# Altium PCB main.PcbDoc
Units mil, origin at the board's own origin, x right, y up, seen from the top; angles counter-clockwise.
Board outline 6000 x 4000 mil, 2 copper layers (Top Layer, Bottom Layer); 94 components, 60 nets, 334 pads, 49 vias.
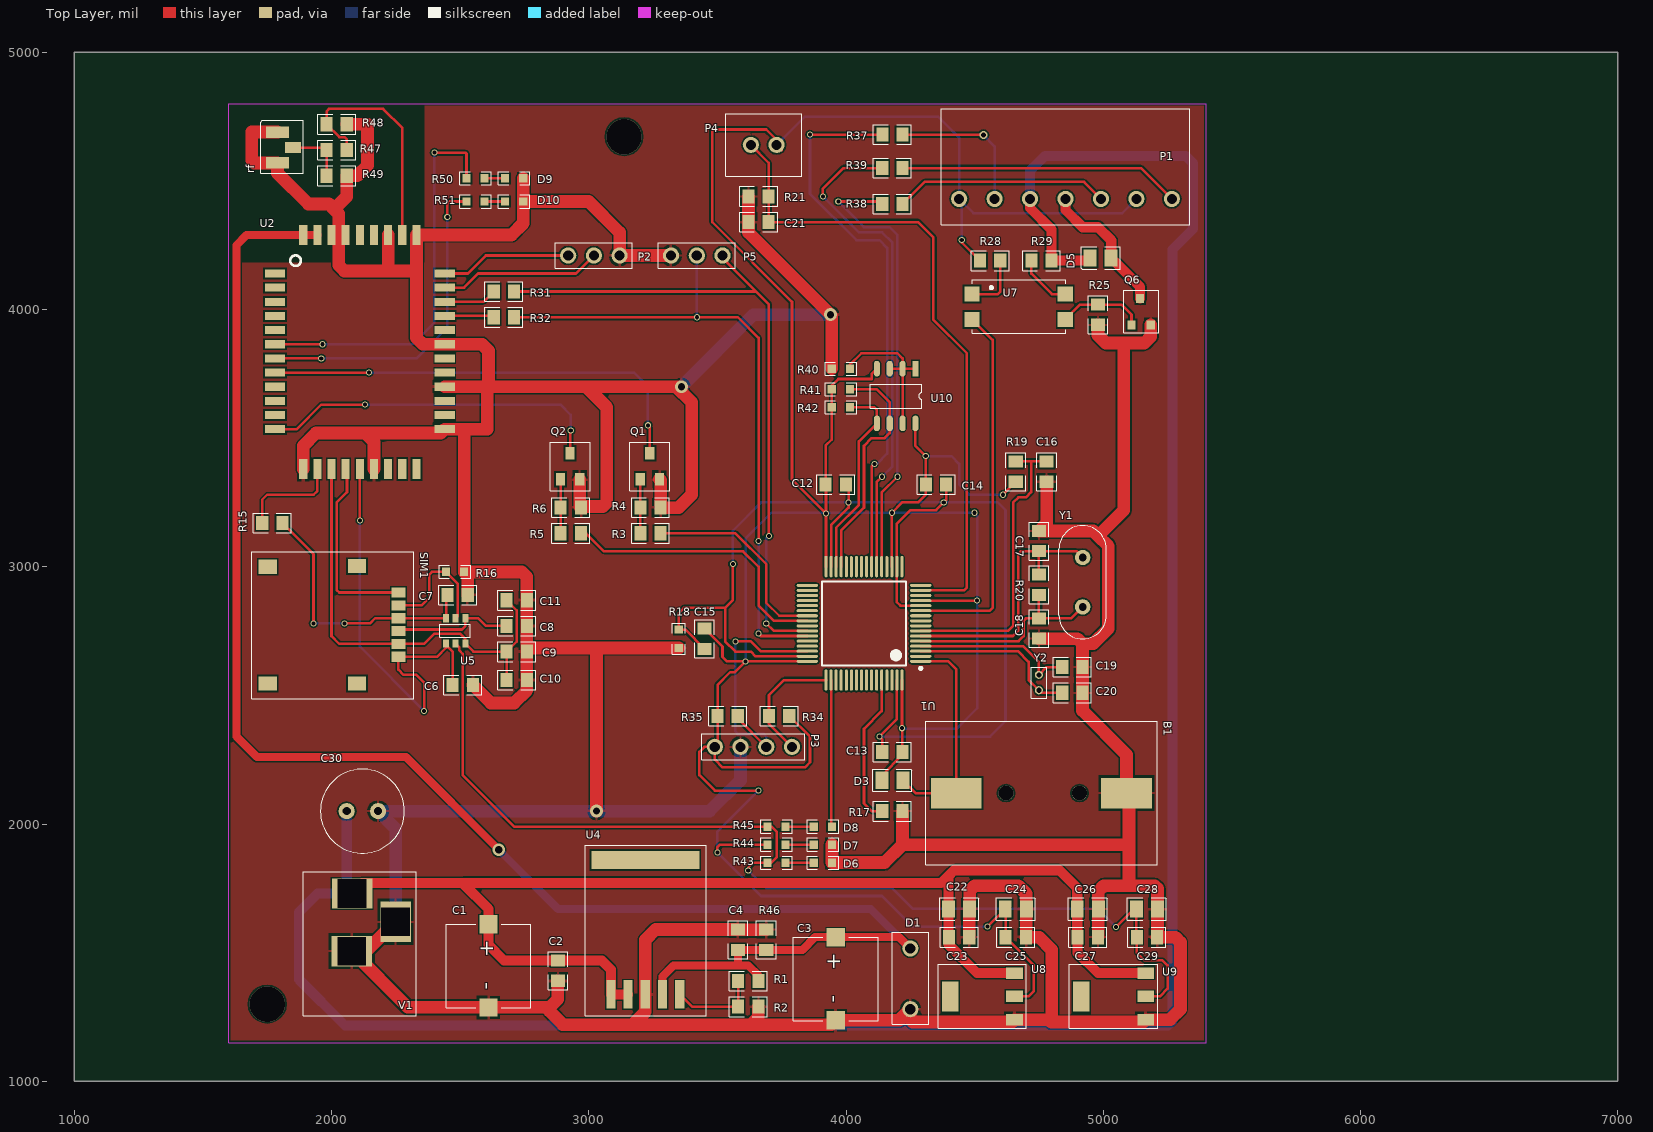
[diagram p0: Top Layer view]
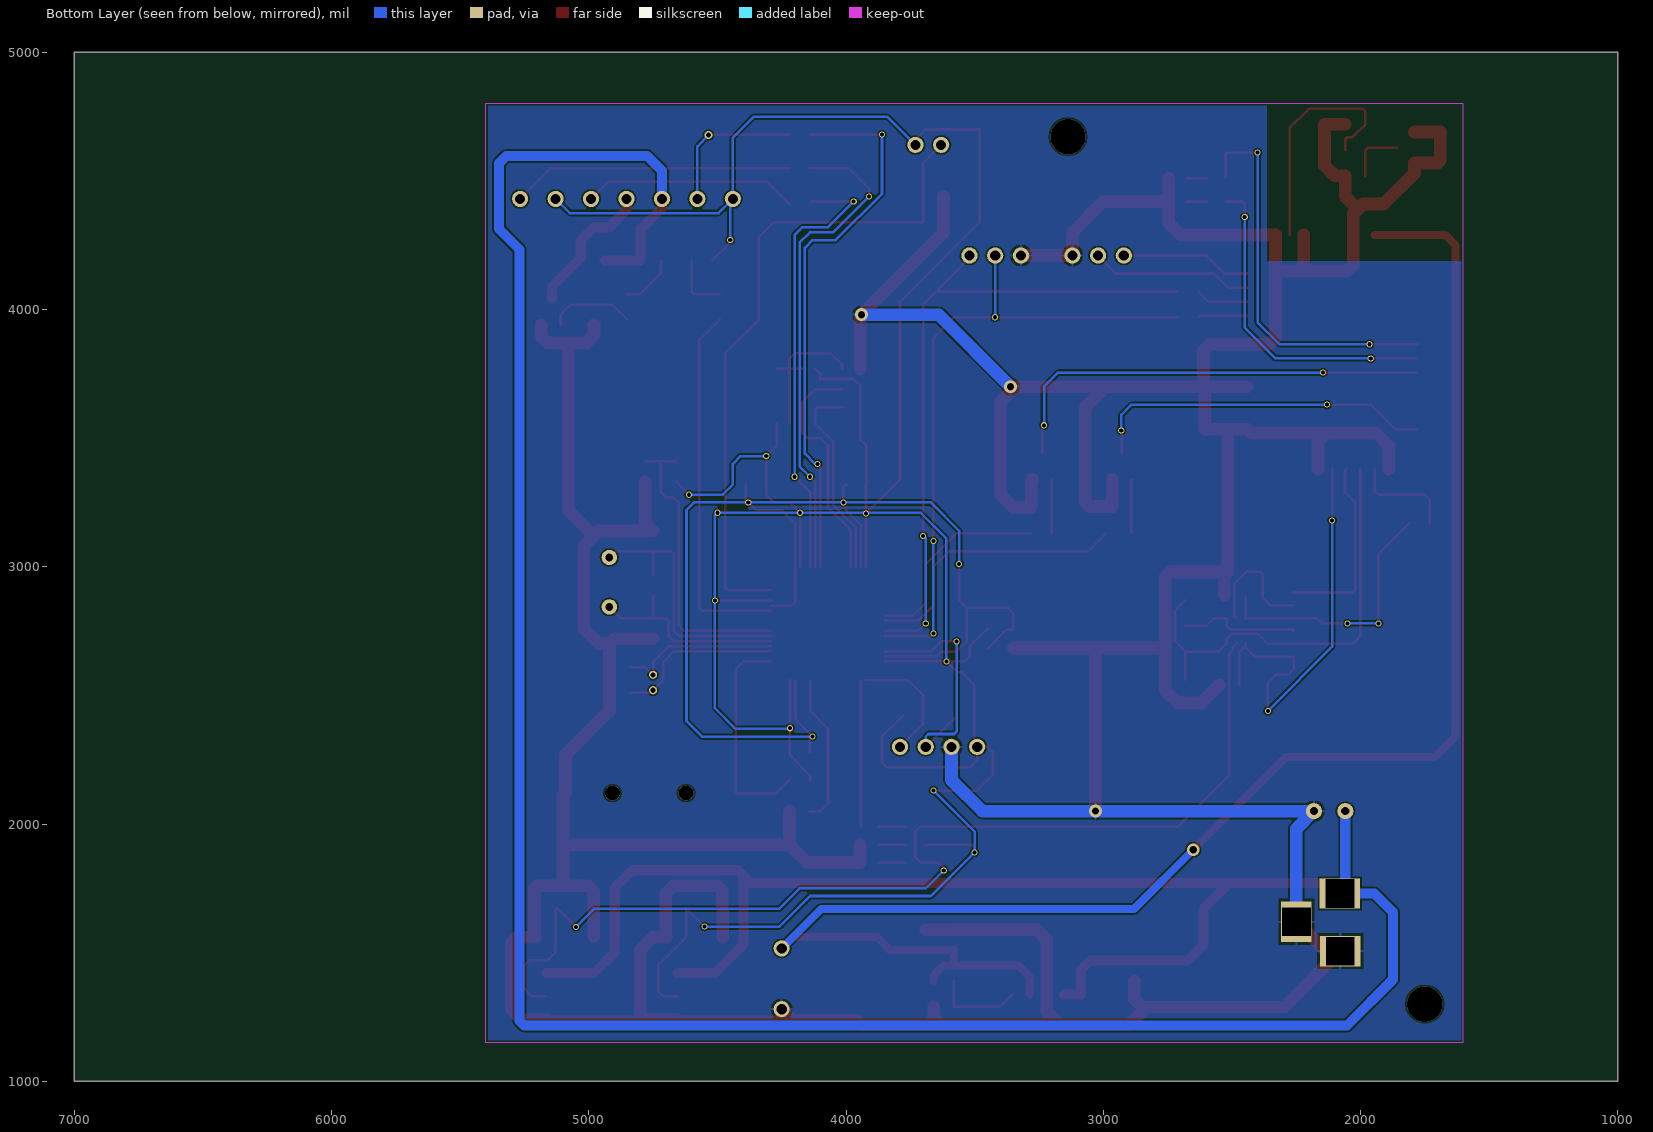
[diagram p1: Bottom Layer view, seen from below]

## Layer stack, top to bottom
Top Solder: solder mask 0.4, Solder Resist, Dk 3.5
Top Layer: signal copper 1.4
Dielectric 1: dielectric 12.6, FR-4, Dk 4.8
Bottom Layer: signal copper 1.4
Bottom Solder: solder mask 0.4, Solder Resist, Dk 3.5

## Board outline
1000,1000 7000,1000 7000,5000 1000,5000

## Design rules (kind name [scope] priority, off if disabled: settings)
Clearance [All] p1: gap=6.06
PolygonConnect [All] p1: connectstyle=Relief reliefconductorwidth=10 reliefentries=4 polygonreliefangle="90 Angle" airgapwidth=10
RoutingVias [All] p1: holewidth=28 width=50 viastyle="Through Hole" minholewidth=28 minwidth=50 maxholewidth=28 maxwidth=50
SolderMaskExpansion [All] p1: expansion=4
Width NetD5_1 [InNet('NetD5_1')] p1: maxlimit=39.37 minlimit=39.37 preferedwidth=39.37
Width NetD4_1 [InNet('NetD4_1')] p2: maxlimit=39.37 minlimit=39.37 preferedwidth=39.37
Width VCC4.16 [InNet('VCC4.16')] p3: maxlimit=31.5 minlimit=31.5 preferedwidth=31.5
Width GND [InNet('GND')] p4: maxlimit=49.37 minlimit=49.37 preferedwidth=49.37
Width VCC12 [InNet('VCC12V')] p5: maxlimit=39.37 minlimit=39.37 preferedwidth=39.37
Width [All] p6: maxlimit=10 minlimit=10 preferedwidth=10
29 further rules are at their usual default settings.

## Components (designator, comment, footprint, x,y, rotation, side; value= is the part's Value field where it differs from the comment)
B1 "CR1220" CR1220 4760,2120 r0 top
C1 "470uF" CAP_8.2MM*8.2MM 2610,1610 r270 top
C2 "100nF" 0805 2880,1430 r90 top
C3 "470uF" CAP_8.2MM*8.2MM 3960,1560 r270 top
C4 "100nF" 0805 3580,1550 r90 top
C6 "33pF" 0805 2510,2540 r180 top
C7 "33pF" 0805 2490,2890 r180 top
C8 "33pF" 0805 2720,2770 r180 top
C9 "33pF" 0805 2720,2670 r180 top
C10 "1uF" 0805 2720,2560 r180 top
C11 "100pF" 0805 2720,2870 r180 top
C12 "0.1uF" 0805 3960,3320 r0 top
C13 "0.1uF" 0805 4180,2280 r180 top
C14 "0.1uF" 0805 4350,3320 r0 top
C15 "0.1uF" 0805 3450,2720 r270 top
C16 "0.1uF" 0805 4780,3370 r270 top
C17 "20pF" 0805 4750,3100 r270 top
C18 "20pF" 0805 4750,2760 r90 top
C19 "12pF" 0805 4880,2610 r180 top
C20 "12pF" 0805 4880,2510 r180 top
C21 "0.1uF" 0805 3660,4340 r0 top
C22 "10uF" 1206 4440,1670 r0 top
C23 "0.1uF" 0805 4440,1560 r180 top
C24 "22uF" 1206 4660,1670 r0 top
C25 "0.1uF" 0805 4660,1560 r180 top
C26 "10uF" 1206 4940,1670 r0 top
C27 "0.1uF" 0805 4940,1560 r180 top
C28 "22uF" 1206 5170,1670 r0 top
C29 "0.1uF" 0805 5170,1560 r0 top
C30 "470uF" DIP2_8.3X3.1 2120,2050 r0 top
D1 "1N4733A" DIP-6MM 4250,1280 r90 top
D3 "IN4148" 1206 4180,2170 r0 top
D5 "IN4148" 1206 4990,4200 r180 top
D6 "DIODE" 0603 3910,1850 r0 top
D7 "DIODE" 0603 3910,1920 r0 top
D8 "DIODE" 0603 3910,1990 r0 top
D9 "blue" 0603 2710,4510 r0 top
D10 "green" 0603 2710,4420 r0 top
P1 "Pin7" PIN_7_3.5MM 4440,4430 r0 top
P2 "pin3" PIN3 3020,4210 r0 top
P3 "SWD" PIN4 3490,2300 r0 top
P4 "Pin2" XH2.54_2 3730,4640 r180 top
P5 "pin3" PIN3 3420,4210 r180 top
Q1 "S8050" SOT-23 3200,3340 r0 top
Q2 "S8050" SOT-23 2890,3340 r0 top
Q6 "N-MOS" SOT-23-3 5110,3940 r0 top
R1 "120K" 0805 3620,1390 r0 top
R2 "56K" 0805 3620,1290 r0 top
R3 "4.7K" 0805 3240,3130 r180 top
R4 "10K" 0805 3240,3230 r180 top
R5 "4.7K" 0805 2930,3130 r180 top
R6 "10K" 0805 2930,3230 r180 top
R15 "1K" 0805 1770,3170 r180 top
R16 "0" 0603 2480,2980 r180 top
R17 "10K" 0805 4180,2050 r0 top
R18 "0" 0603 3350,2720 r90 top
R19 "10K" 0805 4660,3370 r90 top
R20 "1M" 0805 4750,2930 r270 top
R21 "10K" 0805 3660,4440 r0 top
R25 "10K" 0805 4980,3980 r90 top
R28 "1K" 0805 4560,4190 r180 top
R29 "330" 0805 4760,4190 r0 top
R31 "300" 0805 2670,4070 r0 top
R32 "300" 0805 2670,3970 r0 top
R34 "10K" 0805 3740,2420 r0 top
R35 "10K" 0805 3540,2420 r180 top
R37 "1K" 0805 4180.63,4680 r180 top
R38 "1K" 0805 4180,4410 r180 top
R39 "1k" 0805 4180,4550 r180 top
R40 "0" 0603 3980,3770 r0 top
R41 "4.7K" 0603 3980,3690 r180 top
R42 "4.7K" 0603 3980,3620 r180 top
R43 "1K" 0603 3730,1850 r0 top
R44 "1K" 0603 3730,1920 r0 top
R45 "1K" 0603 3730,1990 r0 top
R46 "10K" 0805 3690,1550 r270 top
R47 "0" 0805 2020,4620 r180 top
R48 "NC" 0805 2020,4720 r180 top
R49 "NC" 0805 2020,4520 r180 top
R50 "470" 0603 2560,4510 r180 top
R51 "470" 0603 2560,4420 r180 top
rf "IPEX1" IPEX_1 1790,4570 r90 top
SIM1 "NANO-SIM-6P" NANO-SIM-6P 2260,2900 r270 top
U1 "STM32F103RCT6" STM-LQFP64_M 4070,2780 r180 top
U2 "GSM_A6" PCBA6 2420,3160 r90 top
U4 "MIC29302WU" TO-263-5 3220,1540 r0 top
U5 "SRV05-4" SOT-23-6 2520,2800 r180 top
U7 "OPT" SOP4 4490,4060 r0 top
U8 "AMS1117-3.3V" SOT-223 4530,1330 r90 top
U9 "AMS1117-5V" SOT-223 5040,1330 r90 top
U10 "AT24C02C" SOP8 4270,3770 r270 top
V1 "POWER_PIN" POWER_PIN_PCB 2080,1730 r180 top
Y1 "8M" CRYSTAL 4920,2940 r0 top
Y2 "32.768K" PIN1.1 4750,2550 r270 top

## Footprints (in the part's own frame and the unit in brackets; to place one, negate y for a bottom-side part, rotate by r counter-clockwise, add the part's x,y. Pads: shape width x height; smd on the part's side, far side on the other; paste and mask are expansions set on the pad)
0603 [mm] "0603"
  rect 0.8x0.83 smd: 1(-0.9,0) 2(0.9,0)
  silkscreen extent -1.55,-0.65 1.55,0.65
0805 [mm]
  rect 1.2x1.4 smd: 1(-1,0) 2(1,0)
  silkscreen extent -1.88,-0.97 1.88,0.97
1206 [mm]
  rect 1.28x1.7 smd: 1(-1.04,0) 2(1.04,0)
  silkscreen extent -1.92,-1.1 1.92,1.1
CAP_8.2MM*8.2MM [mm]
  rect 1.8x1.8 smd: 1(0,0) 2(8.2,0)
  silkscreen extent 0,-4.19 8.26,4.19
CR1220 [mm]
  rect 5x3 smd: 1(-8.4,0) 2(8.4,0)
  round 1.5 hole 1.5: 3(-3.5,0) 4(3.75,0)
  silkscreen extent -11.43,-7.09 11.43,7.11
CRYSTAL [mil]
  round 60 hole 30: 1(0,96.06) 2(0,-96.06)
  silkscreen extent -93,-220 93,220
DIP2_8.3X3.1 [mm]
  round 1.6 hole 0.8: 1(-1.55,0) 2(1.55,0)
  silkscreen extent -4.15,-4.15 4.15,4.15
DIP-6MM [mm]
  round 1.6 hole 1: 1(0,0) 2(6,0)
  silkscreen extent -1.5,-1.8 7.6,1.8
IPEX_1 [mm]
  rect 1.12x2.3 smd: 1(0,0) 2(3.02,0)
  rect 1.12x1.6 smd: 3(1.524,-1.524)
  silkscreen extent -1.04,-2.54 4.19,1.65
NANO-SIM-6P [mm]
  rect 1x1.4 smd: 1(0,0) 2(2.54,0) 3(5.08,0) 5(1.27,0) 6(3.81,0) 7(6.35,0)
  rect 1.4x1.8 smd: 8(-2.54,-12.9) 9(9,-4.1) 10(9,-12.9) 12(-2.6,-4.1)
  silkscreen extent -4,-14.5 10.5,1.5
PCBA6 [mm]
  rect 0.8x2 smd: 1(24.892,16.256) 2(23.495,16.256) 3(22.098,16.256) 4(20.701,16.256) 5(19.304,16.256) 6(17.907,16.256) 7(16.51,16.256) 8(15.113,16.256) 9(13.716,16.256) 10(12.319,16.256) 11(10.922,16.256) 12(9.525,16.256) 22(9.525,-0.508) 23(10.922,-0.508) 24(12.319,-0.508) 25(13.716,-0.508) 26(15.113,-0.508) 27(16.51,-0.508) 28(17.907,-0.508) 29(19.304,-0.508) 30(20.701,-0.508) 31(22.098,-0.508) 32(23.495,-0.508) 33(24.892,-0.508)
  rect 2x0.8 smd: 13(5.588,13.462) 14(5.588,12.065) 15(5.588,10.668) 16(5.588,9.271) 17(5.588,7.874) 18(5.588,6.477) 19(5.588,5.08) 20(5.588,3.683) 21(5.588,2.286) 34(28.702,2.286) 35(28.702,3.683) 36(28.702,5.08) 37(28.702,6.477) 38(28.702,7.874) 39(28.702,9.271) 40(28.702,10.668) 41(28.702,12.065) 42(28.702,13.462)
  silkscreen extent 25.64,13.7 26.69,14.75
PIN1.1 [mm]
  round 0.8 hole 0.5: 1(-0.762,0) 2(0.762,0)
  silkscreen extent -1.52,-0.74 1.55,0.76
PIN3 [mm]
  round 1.6 hole 1: 1(-2.54,0) 2(0,0) 3(2.54,0)
  silkscreen extent -3.81,-1.27 3.81,1.27
PIN4 [mm]
  round 1.6 hole 1: 1(0,0) 2(2.54,0) 3(5.08,0) 4(7.62,0)
  silkscreen extent -1.27,-1.27 8.89,1.27
PIN_7_3.5MM [mm]
  round 1.6 hole 1: 1(0,0) 2(3.5,0) 3(7,0) 4(10.5,0) 5(14,0) 6(17.5,0) 7(21,0)
  silkscreen extent -1.75,-2.54 22.75,8.89
POWER_PIN_PCB [mm]
  rect 4x3 hole 2.8 square: 1(0,0) 3(0.033,5.7)
  rect 3x4 hole 2.8 square: 2(-4.3,2.8)
  silkscreen extent -6.35,-2.16 4.8,12.06
SOP4 [mm]
  rect 1.5x1.5 smd: 1(0,0) 2(0,-2.5) 3(9.2,-2.5) 4(9.2,0)
  silkscreen extent 0,-3.86 9.25,1.4
SOP8 [mil]
  rect 61x24 smd: 1(0,0)
  oval 61x24 smd: 2(0,-50) 3(0,-100) 4(0,-150) 5(212.6,-150) 6(212.6,-100) 7(212.6,-50) 8(212.6,0)
  silkscreen extent 59,-175 153,25
SOT-23 [mm]
  rect 0.915x1.27 smd: 1(0,0) 2(1.9,0) 3(0.95,2.57)
  silkscreen extent -1.02,-1.14 2.92,3.68
SOT-23-3 [mm]
  rect 0.8x0.9 smd: 1(0,0) 2(1.9,0) 3(0.85,2.6)
  silkscreen extent -0.76,-0.76 2.69,3.43
SOT-23-6 [mm]
  rect 0.6x0.8 smd: 1(0,0) 2(0.95,0) 3(1.9,0) 4(1.9,2.5) 5(0.95,2.5) 6(0,2.5)
  silkscreen extent -0.5,0.6 2.5,1.9
SOT-223 [mm]
  rect 1.14x1.65 smd: 1(-2.3,-3.175) 2(0,-3.175) 3(2.3,-3.175)
  rect 3x1.65 smd: 4(-0.014,3.175)
  silkscreen extent -3.14,-4.35 3.16,4.38
STM-LQFP64_M [mm] "Thin QFP, 64-Leads, Body 10x10mm, Pitch 0.5mm, IPC Low Density"
  oval 2.1x0.3 smd: 1(-5.6,3.75) 2(-5.6,3.25) 3(-5.6,2.75) 4(-5.6,2.25) 5(-5.6,1.75) 6(-5.6,1.25) 7(-5.6,0.75) 8(-5.6,0.25) 9(-5.6,-0.25) 10(-5.6,-0.75) 11(-5.6,-1.25) 12(-5.6,-1.75) 13(-5.6,-2.25) 14(-5.6,-2.75) 15(-5.6,-3.25) 16(-5.6,-3.75) 33(5.6,-3.75) 34(5.6,-3.25) 35(5.6,-2.75) 36(5.6,-2.25) 37(5.6,-1.75) 38(5.6,-1.25) 39(5.6,-0.75) 40(5.6,-0.25) 41(5.6,0.25) 42(5.6,0.75) 43(5.6,1.25) 44(5.6,1.75) 45(5.6,2.25) 46(5.6,2.75) 47(5.6,3.25) 48(5.6,3.75)
  oval 0.3x2.1 smd: 17(-3.75,-5.6) 18(-3.25,-5.6) 19(-2.75,-5.6) 20(-2.25,-5.6) 21(-1.75,-5.6) 22(-1.25,-5.6) 23(-0.75,-5.6) 24(-0.25,-5.6) 25(0.25,-5.6) 26(0.75,-5.6) 27(1.25,-5.6) 28(1.75,-5.6) 29(2.25,-5.6) 30(2.75,-5.6) 31(3.25,-5.6) 32(3.75,-5.6) 49(3.75,5.6) 50(3.25,5.6) 51(2.75,5.6) 52(2.25,5.6) 53(1.75,5.6) 54(1.25,5.6) 55(0.75,5.6) 56(0.25,5.6) 57(-0.25,5.6) 58(-0.75,5.6) 59(-1.25,5.6) 60(-1.75,5.6) 61(-2.25,5.6) 62(-2.75,5.6) 63(-3.25,5.6) 64(-3.75,5.6)
  silkscreen extent -5.72,-4.15 4.15,4.57, body extent -5,-5 5,5, height 1.6
TO-263-5 [mm]
  rect 0.91x2.8 smd: 1(-3.4,-5.138) 2(-1.7,-5.138) 3(0,-5.138) 4(1.7,-5.138) 5(3.4,-5.138)
  rect 10.668x1.8 smd: 6(0,8.138)
  silkscreen extent -5.94,-7.26 5.99,9.6
XH2.54_2 [mm]
  round 1.6 hole 1: 1(0,0) 2(2.54,0)
  silkscreen extent -2.5,-3.1 5,3.1

## Part data
B1: library part BAT
C1 C3 C22 C24 C26 C28 C30: library part Cap_Elec
C2 C4 C6 C7 C8 C9 C10 C11 C12 C13 C14 C15 C16 C17 C18 C19 C20 C21 C23 C25 C27 C29: library part Cap
D1 D3 D5 D9 D10: library part DIODE
Q1 Q2: library part Npn-Sot-23
R1 R2 R3 R4 R5 R6 R15 R16 R17 R18 R19 R20 R21 R25 R28 R29 R31 R32 R34 R35 R37 R38 R39 R40 R41 R42 R43 R44 R45 R46 R47 R48 R49 R50 R51: library part Res
U1: "ARM Cortex-M3 32-bit MCU, 256 KB Flash, 48 KB Internal RAM, 51 I/Os, 64-pin LQFP, -40 to 85 degC, Tray"
U9: library part AMS1117-3.3V
Y1 Y2: library part crystal

## Via types
v1: diameter 23.62, hole 15.75, Top Layer to Bottom Layer, 42 vias
v2: diameter 50, hole 28, Top Layer to Bottom Layer, 4 vias
v3: diameter 137.8, hole 137.8, Top Layer to Bottom Layer, 2 vias
v4: diameter 31.5, hole 19.68, Top Layer to Bottom Layer, 1 vias

## Nets (pads, with @x,y where several pads share a name; then routed paths per layer and width w, separated by ;. In a path a pad name is that pad's centre, name@x,y a point inside that pad or via, vN(x,y) a via of type N, cw(c..) or ccw(c..) an arc to the next point about the centre after c; other vN are vias at no path point)
ADC1: C21.2 P4.2 R21.2 U1.15 | length 2592.6
  Top Layer w10: P4.2 3699.37,4570.63 R21.2 C21.2 4280,4340 4340,4280 4340,3960 4470,3830 4470,2920 4457.95,2907.95 U1.15
DOOR_NO: R39.2 U1.22 | length 1923
  Top Layer w10: v1(3910,4440) 3910,4470 3990,4550 R39.2 ; U1.22 4119.21,3329.21 v1(4140,3350)
  Bottom Layer w10: v1(3910,4440) 4050,4300 4140,4300 4180,4260 4180,3390 v1(4140,3350)
DOOR_OPEN: R38.2 U1.21 | length 1759.3
  Top Layer w10: v1(3970,4420) R38.2@4130.63,4420 ; U1.21 4138.9,3288.9 v1(4200,3350)
  Bottom Layer w10: v1(3970,4420) 4070,4320 4170,4320 4200,4290 v1(4200,3350)
EEP_SCL: R41.1 U1.29 U10.6 | length 922.2
  Top Layer w10: U1.29 3981.42,3141.42 4070,3230 4070,3470 4100,3500 4150,3500 4170,3520 U10.6 4170,3640 4120,3690 R41.1
EEP_SDA: R42.1 U1.30 U10.5 | length 783.8
  Top Layer w10: U1.30 3961.73,3151.73 4050,3240 4050,3487.4 U10.5 4120,3610 4110,3620 R42.1
GND: B1.2 C1.2 C2.1 C3.2 C4.2 C6.1 C7.1 C8.1 C9.1 C10.1 C11.1 C16.2 C17.1 C18.1 C19.1 C20.1 C21.1 C22.2 C23.1 C24.2 C25.1 C26.2 C27.1 C28.2 C29.2 C30.2 D1.1 D6.2 D7.2 D9.2 D10.2 P2.3 P3.2 P5.3 Q1.2 Q2.2 Q6.2 R2.2 R4.1 R6.1 R16.1 R17.2 R18.1 R21.1 R25.1 R40.1 R46.1 R48.1 R49.1 rf.1 rf.2 U2.13 U2.18 U2.22 U2.25 U2.28 U2.34 U2.36 U2.39 U2.40 U4.3 U8.1 U9.1 V1.2 V1.3 | length 25108.2
  Top Layer w49.37: rf.2 1788.9,4690 1690,4690 1690,4580 1700,4570 rf.1 1790,4530 1910,4410 1990,4410 2010,4390 ; U2.13 1890,3470 1940,3520 2130,3520 ; R48.1 2140,4720 2140,4560 2100,4520 R49.1 2059.37,4439.37 2010,4390 ; U2.18 2165,3485 2130,3520 ; U2.36 2220,4160 2230,4150 ; V1.2 2135.12,1505.59 V1.3 2297.13,1287.17 C1.2 2847.17,1287.17 ; U2.25 2600,3700 ; C7.1 2529.37,2966.06 R16.1 ; C6.1 2619.37,2470 2710,2470 2759.37,2519.37 C10.1 C9.1 ; D9.2 D10.2 ; C2.1 2880,1320 2847.17,1287.17 ; Q2.2 2964.8,3234.57 3054.57,3234.57 3070,3250 3070,3620 2990,3700 ; v2(3030,2050) 3030,2684.57 ; Q1.2 3279.37,3335.43 R4.1 3350,3230 3400,3280 3400,3640 v2@3340,3700 ; P5.3 P2.3 3120,4300 3000,4420 D10.2 ; R18.1 3030,2684.57 ; v2(3360,3700) v2@3340,3700 ; R21.1 C21.1 3620.63,4299.37 v2(3940,3980) 3944.57,3975.43 R40.1 ; R2.2 3659.37,1249.37 3630,1220 ; R46.1 C4.2 3579.37,1590 3260,1590 3220,1550 U4.3 3220,1270 3170,1220 ; D7.2 D6.2 4150,1850 4219.37,1919.37 ; R17.2 4219.37,1919.37 ; C23.1 4479.37,1668.43 C22.2 4480.94,1740.94 4500,1760 4670,1760 4700.94,1729.06 C24.2 C25.1@4700.94,1561.57 ; C25.1 4750,1560 4800,1510 4800,1250 4789.45,1239.45 ; C18.1 4899.37,2720.63 4919.37,2700.63 ; C16.2 4780,3169.37 C17.1 4960.63,3139.37 4980,3120 ; R25.1 4980,3900 5010,3870 5080,3870 ; C27.1@4980.94,1561.57 C26.2 4980.94,1739.06 5001.89,1760 5100,1760 ; Q6.2 5184.8,3894.8 5160,3870 5080,3870 ; C29.2 5280,1560 5300,1540 5300,1280 5259.45,1239.45 U9.1 5155.55,1230 4798.9,1230 4789.45,1239.45 ; C29.2@5210.94,1561.57 C28.2 5210.94,1749.06 5200,1760 5100,1760 ; 2010,4390 2027.5,4372.5 2027.5,4172.5 2050,4150 2230,4150 ; 2130,3520 2425,3520 U2.22 2530,3535 ; 2230,4150 2330,4150 ; 2330,4150 2330,3890 2355,3865 U2.28 2585,3865 2610,3840 2610,3710 2600,3700 ; 2330,4150 U2.34 2700,4290 2745.43,4335.43 D10.2 ; R16.1 2740,2980 2759.37,2960.63 C11.1 C8.1 C9.1 ; R16.1 2515.43,3520.43 2530,3535 ; 2530,3535 2605,3535 2605,3695 2600,3700 ; 2600,3700 2990,3700 ; C9.1 2773.94,2684.57 3030,2684.57 ; 2847.17,1287.17 2847.17,1272.83 2900,1220 3170,1220 ; 2990,3700 v2@3340,3700 ; 3170,1220 3630,1220 ; 3630,1220 3942.83,1220 C3.2 4207.17,1237.17 D1.1 4250,1240 4260,1230 4645.55,1230 U8.1 4789.45,1239.45 ; 4219.37,1919.37 5099.37,1919.37 5100,1920 ; 4919.37,2700.63 C19.1 C20.1 4919.37,2440.63 5090.71,2269.29 B1.2 5100,2110.71 5100,1920 ; 4919.37,2700.63 4960.63,2700.63 5020,2760 5020,3080 4980,3120 ; 4980,3120 5080,3220 5080,3870 ; 5100,1760 5100,1920
  Bottom Layer w49.37: V1.2 2249.29,1981.73 C30.2 v2(3030,2050) 3470,2050 3590,2170 P3.2 ; v2(3360,3700) 3640,3980 v2(3940,3980)
GSM_REST: Q2.3 U2.12 | length 1355.8
  Top Layer w10: U2.12 1865,3535 1960,3630 v1(2130,3630) ; Q2.3 2927.4,3527.4 v1(2930,3530)
  Bottom Layer w10: v1(2130,3630) 2890,3630 2930,3590 v1(2930,3530)
GSM_SIM_RST: R15.2 U2.14 | length 404.2
  Top Layer w10: R15.2 1730.63,3260.63 1750,3280 1930,3280 1945,3295 U2.14
LOCK_NO: R37.2 U1.23 | length 2168.7
  Top Layer w10: v1(3860,4680) R37.2 ; U1.23 4099.53,3389.53 v1(4110,3400)
  Bottom Layer w10: v1(3860,4680) 3860,4450 4040,4270 4130,4270 4160,4240 4160,3440 4120,3400 v1(4110,3400)
MCU_I/O_LOCK: U1.11 U7.2 | length 1438.7
  Top Layer w10: U1.11 4559.21,2829.21 4570,2840 4570,3881.57 U7.2
MCU_IO_PWR: R3.1 U1.39 | length 790.8
  Top Layer w10: R3.1 3570,3130 3690,3010 3690,2860 3740.47,2809.53 U1.39
MCU_IO_REST: R5.1 U1.40 | length 1088.3
  Top Layer w10: R5.1@2990,3130 3060,3060 3600,3060 3660,3000 3660,2850 3720.16,2789.84 U1.40
MCU_REST: C16.1 R19.2 U1.7 | length 1173.3
  Top Layer w10: U1.7 4630,2750.47 4650,2770.47 4650,3250 4670,3270 4700,3270 4720,3290 4720,3409.37 ; R19.2 4720,3409.37 ; C16.1 4720,3409.37
MCU_RXD: P5.2 R32.2 U1.43 | length 2567.1
  Top Layer w10: R32.2 3580,3970 3660,3890 v1(3660,3100) ; v1(3660,2740) 3669.21,2730.79 U1.43
  Bottom Layer w10: v1(3420,3970) P5.2 ; v1(3660,2740) v1(3660,3100)
MCU_TXD: P5.1 R31.2 U1.42 | length 2621.1
  Top Layer w10: R31.2 3650,4070 ; P5.1 3520,4200 3650,4070 ; v1(3690,2780) 3719.53,2750.47 U1.42 ; v1(3700,3120) 3700,4020 3650,4070
  Bottom Layer w10: v1(3690,2780) 3690,3110 v1(3700,3120)
NetB1_1: B1.1 D3.2 U1.1 | length 861.7
  Top Layer w10: D3.2 4270.94,2120 B1.1 4429.29,2600.71 4397.64,2632.36 U1.1
NetC12_2: C12.2 C13.2 C14.2 C15.2 R18.2 U1.12 U1.18 U1.31 U1.47 U1.63 | length 4980.6
  Top Layer w10: C15.2 3375.2,2755.43 R18.2 3350,2820 3370,2840 3530,2840 ; v1(3560,3010) 3560,2870 3530,2840 ; U1.47 3647.95,2652.05 3630,2670 3570,2670 3530,2710 3530,2840 ; U1.31 3942.05,3162.05 4010,3230 v1(4010,3250) 4010,3309.37 C12.2 ; C13.2 4140.63,2329.37 v1(4130,2340) 4197.95,2407.95 U1.63 ; U1.12 4211.1,2848.9 4197.95,2862.05 U1.18 4197.95,3167.95 4250,3220 4350,3220 4389.37,3259.37 C14.2
  Bottom Layer w10: v1(3560,3010) 3560,3140 3670,3250 v1(4010,3250) 4590,3250 4620,3220 4620,2400 4560,2340 v1(4130,2340)
  other v1: 4380,3250
NetD5_1: D5.1 P1.4 Q6.3 | length 542.9
  Top Layer w39.37: P1.4 4853.39,4386.61 4920,4320 4980,4320 5030.94,4269.06 D5.1 5143.46,4087.48 Q6.3
NetD6_1: D6.1 R43.2 | length 109.1
  Top Layer w10: R43.2 D6.1
NetD7_1: D7.1 R44.2 | length 109.1
  Top Layer w10: R44.2 D7.1
NetD8_1: D8.1 R45.2 | length 109.1
  Top Layer w10: R45.2 D8.1
NetD9_1: D9.1 R50.1 | length 79.1
  Top Layer w10: R50.1 D9.1
NetD10_1: D10.1 R51.1 | length 79.1
  Top Layer w10: R51.1 D10.1
NetP1_2: P1.2 R37.1 | length 581
  Top Layer w10: R37.1 4532,4680 v4(4534,4678)
  Bottom Layer w10: v4(4534,4678) 4577.8,4634.2 P1.2
NetP1_5: P1.5 R38.1 | length 834.8
  Top Layer w10: R38.1 4305.37,4496 4925.18,4496 P1.5
NetP1_7: P1.7 R39.1 | length 1097.1
  Top Layer w10: R39.1 5146.77,4550 P1.7
NetP2_1: P2.1 U2.33 | length 509
  Top Layer w10: U2.33 2530,4140 2600,4210 P2.1
NetP2_2: P2.2 U2.32 | length 631.8
  Top Layer w10: U2.32 2515,4085 2570,4140 2950,4140 P2.2
NetQ1_1: Q1.1 R3.2 R4.2 | length 210.3
  Top Layer w10: Q1.1 3200,3230.63 R4.2 R3.2
NetQ2_1: Q2.1 R5.2 R6.2 | length 210.3
  Top Layer w10: Q2.1 2890.63,3339.37 R6.2 R5.2
NetQ6_1: Q6.1 R25.2 U7.3 | length 338.4
  Top Layer w10: U7.3 4852.2,3962.2 4909.37,4019.37 R25.2 5070.63,4019.37 5110,3980 Q6.1
NetR1_1: R1.1 R2.1 U4.5 | length 346.5
  Top Layer w10: U4.5 3401.59,1290 R2.1 R1.1
NetR16_2: R16.2 SIM1.5 U5.2 | length 493
  Top Layer w10: SIM1.5 2350,2850 2380,2880 2380,2970 2390,2980 R16.2 2490,2934.57 2490,2807.4 U5.2
NetR17_1: R17.1 U1.60 | length 591.1
  Top Layer w10: U1.60 4138.9,2438.9 4070,2370 4070,2080 4100,2050 R17.1
NetR28_1: R28.1 U7.1 | length 234.4
  Top Layer w10: U7.1 4590,4060 4600,4070 4600,4189.37 R28.1
NetR29_1: R29.1 U7.4 | length 215.1
  Top Layer w10: R29.1 4720.63,4139.37 4800,4060 U7.4
NetR31_1: R31.1 U2.31 | length 207.2
  Top Layer w10: U2.31 2590.63,4030 R31.1
NetR32_1: R32.1 U2.30 | length 192.7
  Top Layer w10: U2.30 2625.63,3975 R32.1
NetR40_2: R40.2 U10.1 U10.2 U10.3 U10.7 | length 599.3
  Top Layer w10: R40.2 4015.43,3785.43 4060,3830 4200,3830 4220,3810 U10.2 ; U10.3 U10.2 ; U10.7 U10.2 ; U10.1 U10.2
NetR47_2: R47.2 R49.2 rf.3 | length 227.4
  Top Layer w10: rf.3@1857,4629.06 1971.57,4629.06 R47.2 R49.2
NetR50_2: R50.2 U2.6 | length 1527.1
  Top Layer w10: U2.6 v1(1965,3865) ; v1(2400,4610) 2520,4610 2524.57,4605.43 R50.2
  Bottom Layer w10: v1(1965,3865) 2315,3865 2400,3950 v1@2400,4600
NetR51_2: R51.2 U2.7 | length 1278.4
  Top Layer w10: U2.7 v1(1960,3810) ; v1(2450,4360) 2450,4410 2460,4420 R51.2
  Bottom Layer w10: v1(1960,3810) 2330,3810 2450,3930 v1(2450,4360)
OSC_IN1: C20.2 U1.3 Y2.2 | length 658.2
  Top Layer w10: U1.3 4668.27,2671.73 4710,2630 4710,2560 Y2.2 4760,2510 C20.2
OSC_IN2: C18.2 R20.2 U1.5 Y1.2 | length 811
  Top Layer w10: U1.5 4671.1,2711.1 4690,2730 4690,2790 4699.37,2799.37 C18.2 ; R20.2 C18.2 ; Y1.2 4875.43,2799.37 C18.2
OSC_OUT1: C19.2 U1.4 Y2.1 | length 638
  Top Layer w10: U1.4 4688.58,2691.42 4750,2630 Y2.1 4780,2610 C19.2
OSC_OUT2: C17.2 R20.1 U1.6 Y1.1 | length 1042.4
  Top Layer w10: U1.6 4649.21,2730.79 4670,2751.57 4670,3050 4680.63,3060.63 C17.2 ; R20.1 C17.2 ; Y1.1 4895.43,3060.63 C17.2
PWRKEY: Q1.3 U2.8 | length 1734.7
  Top Layer w10: U2.8 v1(2145,3755) ; v1(3230,3550) 3237.4,3542.6 Q1.3
  Bottom Layer w10: v1(2145,3755) 3175,3755 3230,3700 v1(3230,3550)
RF: R47.1 R48.2 U2.35 | length 938.9
  Top Layer w10: R47.1 2059.37,4660.63 2050,4670 2030.63,4670 R48.2 1980.63,4770.63 1990,4780 2200,4780 2275,4705 U2.35
SIM_CLK: C9.2 C10.2 C11.2 SIM1.3 U2.15 U5.6 | length 1742
  Top Layer w10: U2.15 2000,2730 2030,2700 SIM1.3 2360,2700 2400,2740 2500,2740 2520,2720 U5.6 2551.57,2670 C9.2 ; C10.2 C9.2 ; C11.2 2720,2830.63 2720,2709.37 C9.2
SIM_I/O: C6.2 SIM1.7 U2.17 U5.4 | length 1706.7
  Top Layer w10: v1(2110,3180) U2.17 ; v1(2360,2440) 2360,2550 2330,2580 2280,2580 2260,2600 SIM1.7 2410,2650 2445.2,2685.2 U5.4@2445.2,2695.77 ; U5.4 U5.4@2445.2,2695.77 ; C6.2 2470.63,2670.34 U5.4@2445.2,2695.77
  Bottom Layer w10: v1(2110,3180) 2110,2690 v1(2360,2440)
SIM_RST: C7.2 R15.1 SIM1.2 U5.3 | length 1048
  Top Layer w10: R15.1 1930,3049.37 v1(1930,2780) ; v1(2050,2780) 2150,2780 2170,2800 SIM1.2 U5.3 C7.2@2445.2,2884.57
  Bottom Layer w10: v1(1930,2780) v1(2050,2780)
SIM_VDD: SIM1.1 U2.16 | length 732.8
  Top Layer w10: U2.16 2060,3375 2060,3290 2020,3250 2020,2910 2030,2900 SIM1.1
SIM_VPP: C8.2 SIM1.6 U5.1 | length 475.2
  Top Layer w10: SIM1.6 2260,2756.06 2506.65,2756.06 2520,2769.41 U5.1 2570,2800 2600,2770 C8.2
SW_CLK: P3.4 R34.1 U1.49 | length 483.8
  Top Layer w10: P3.4 3700.63,2389.37 R34.1 3700.63,2500.63 3759.53,2559.53 U1.49
SW_DIO: P3.3 R35.1 U1.46 | length 970.1
  Top Layer w10: v1(3570,2710) 3630,2710 3668.27,2671.73 U1.46 ; R35.1@3579.37,2410.63 P3.3
  Bottom Layer w10: v1(3570,2710) 3570,2360 3580,2350 3680,2350 3690,2340 P3.3
TEST: D8.2 U1.50 | length 570.9
  Top Layer w10: U1.50 3942.05,1993.39 D8.2
VCC3.3: C12.1 C13.1 C14.1 C15.1 C24.1 C25.2 D3.1 P1.1 P1.6 P3.1 P4.1 R19.1 R28.2 R34.2 R35.2 R41.2 R42.2 R44.1 U1.13 U1.19 U1.32 U1.48 U1.64 U8.2 U10.4 U10.8 | length 13388.1
  Top Layer w10: C15.1 3450.63,2759.37 3520,2690 3520,2650 3537.64,2632.36 v1(3610,2632.36) ; v1(3500,1890) 3500,1910 3510,1920 R44.1 ; P3.1@3500.63,2310.63 R35.2 3500.63,2540.63 3550,2590 3567.64,2590 v1(3610,2632.36) ; v1(3660,2130) 3490,2130 3430,2190 3430,2280 3450,2300 P3.1 3490,2250 3520,2220 3840,2220 3860,2240 3860,2339.37 R34.2 ; P4.1@3750,4620 P4.1 3730,4660 3690,4700 3480,4700 3480,4340 3790,4030 3790,3340 v1(3922.36,3207.64) ; U1.48 v1(3610,2632.36) ; U1.32 v1(3922.36,3207.64) ; U10.4 4100,3750 4100,3730 3970,3730 3944.57,3704.57 R41.2 R42.2 3944.57,3494.57 3920.63,3470.63 C12.1 3922.36,3318.27 v1(3922.36,3207.64) ; D3.1 4139.06,2189.06 4219.37,2269.37 C13.1 4219.37,2370.63 v1(4217.64,2372.36) U1.64 ; U1.19 v1(4178.27,3210) 4218.27,3250 4280,3250 4310.63,3280.63 C14.1 4310.63,3429.37 4270,3470 U10.8 ; U1.13 v1(4508.58,2868.58) ; v1(4450,4270) 4450,4260.63 R28.2 ; v1@4550,1600 v1(4550,1600.94) C24.1 4620.63,1668.43 C25.2 4730,1450.63 4730,1350 4710,1330 U8.2 ; v1(4610,3280) 4610,3280.63 R19.1
  Bottom Layer w10: v1(3610,2632.36) 3610,3110 3710,3210 v1(4178.27,3210) v1(4500,3210) 4510,3200 4510,2450 4430,2370 v1@4217.64,2370 ; v1(3660,2130) 3500,1970 v1(3500,1890) 3670,1720 4140,1720 4259.06,1600.94 v1(4550,1600.94) ; P4.1 3839,4749 4359,4749 4440,4668 P1.1 P1.1@4450,4420 ; v1(4310,3430) 4410,3430 4440,3400 4440,3320 4480,3280 v1(4610,3280) ; v1(4450,4270) P1.1@4450,4420 ; P1.6 5073.98,4375 4495,4375 P1.1@4450,4420
VCC4.16: C3.1 C4.1 D1.2 R1.2 R46.2 U2.41 U2.42 U4.4 | length 6468.4
  Top Layer w31.5: U2.41 U2.42 1670,4290 1630,4250 1630,2340 1710,2260 2290,2260 v2(2650,1900) ; U4.4 3286.93,1406.93 3330,1450 3580,1450 ; R1.2 3659.37,1410.63 3620,1450 3580,1450 ; D1.2 4206.22,1560 C3.1 3880,1560 3830.63,1510.63 R46.2 C4.1 3580,1450
  Bottom Layer w31.5: v2(2650,1900) 2880,1670 4096.22,1670 D1.2
VCC5: C28.1 C29.1 R43.1 R45.1 U5.5 U9.2 | length 4196.1
  Top Layer w10: U5.5 2497.13,2687.05 2497.13,2674.76 2510,2661.89 2510,2190 2710,1990 R45.1 3710,1990 3730,1970 3730,1870 3710,1850 R43.1 3640,1850 3620,1830 v1(3620,1820) ; v1(5050,1600) 5120,1670 C28.1 C29.1@5129.06,1561.57 ; C29.1 5130.63,1499.37 5160,1470 5230,1470 5250,1450 5250,1360 5220,1330 U9.2
  Bottom Layer w10: v1(3620,1820) 3690,1750 4180,1750 4260,1670 4980,1670 v1(5050,1600)
VCC12V: C1.1 C2.2 C22.1 C23.2 C26.1 C27.2 C30.1 D5.2 P1.3 R29.2 U4.1 U4.2 U8.3 U9.3 V1.1 | length 13826.4
  Top Layer w39.37: V1.1 2120,1770 2510,1770 ; U4.2 U4.1 3086.14,1433.86 3050.63,1469.37 C2.2 2670.63,1469.37 2610,1530 C1.1 2610,1670 2510,1770 ; U8.3 4509.45,1420.55 4399.06,1530.94 C22.1 4399.06,1799.06 ; P1.3 4715.59,4394.41 4799.37,4310.63 R29.2 D5.2@4939.06,4190 ; C27.2@4899.06,1561.57 C26.1 4899.06,1750.94 4830,1820 4420,1820 4399.06,1799.06 ; C27.2 4900.63,1499.37 4979.45,1420.55 U9.3 ; 2510,1770 4370,1770 4399.06,1799.06
  Bottom Layer w39.37: C30.1 2058.98,1751.02 V1.1 1946,1730 1874,1658 1874,1395 2052,1217 5252,1217 5269,1234 5269,4233 5349,4313 5349,4569 5321,4597 4773,4597 4715.59,4539.59 P1.3
pads on no net: B1.3 B1.4 SIM1.8 SIM1.9 SIM1.10 SIM1.12 U1.2 U1.8 U1.9 U1.10 U1.14 U1.16 U1.17 U1.20 U1.24 U1.25 U1.26 U1.27 U1.28 U1.33 U1.34 U1.35 U1.36 U1.37 U1.38 U1.41 U1.44 U1.45 U1.51 U1.52 U1.53 U1.54 U1.55 U1.56 U1.57 U1.58 U1.59 U1.61 U1.62 U2.1 U2.2 U2.3 U2.4 U2.5 U2.9 U2.10 U2.11 U2.19 U2.20 U2.21 U2.23 U2.24 U2.26 U2.27 U2.29 U2.37 U2.38 U4.6 U8.4 U9.4
copper on no net:
  other v3: 1750,1300 3137,4672

## Polygon pours and split planes (outlines as drawn)
GND on Bottom Layer "Top Layer-No Net" (solid, pour order 6): 1600,1150 5400,1150 5400,4800 5399,4799 2365,4799 2365,4187 1593,4187 1593,1157 1600,1150
GND on Top Layer "Top Layer-No Net" (solid, pour order 10): 2364,4802 2366,4800 5400,4800 5400,1150 1600,1150 1600,4183 1599,4184 1602,4181 2363,4181 2363,4795 2367,4799

## Keep-outs
Keep-Out Layer:
  lines w3.94: 1600,1150 1600,1160 1600,1200 1600,4700 1600,4800 5400,4800 5400,4750 5400,1150 1600,1150

## Text inside footprints (layer, text, board x,y; h text height)
C1: Top Overlay "+" at 2580,1550 h60 r270; Top Overlay "-" at 2580,1385 h60 r270
C3: Top Overlay "+" at 3930,1500 h60 r270; Top Overlay "-" at 3930,1335 h60 r270